# EAGLE board pcb arriba (EAGLE 9.6.2)
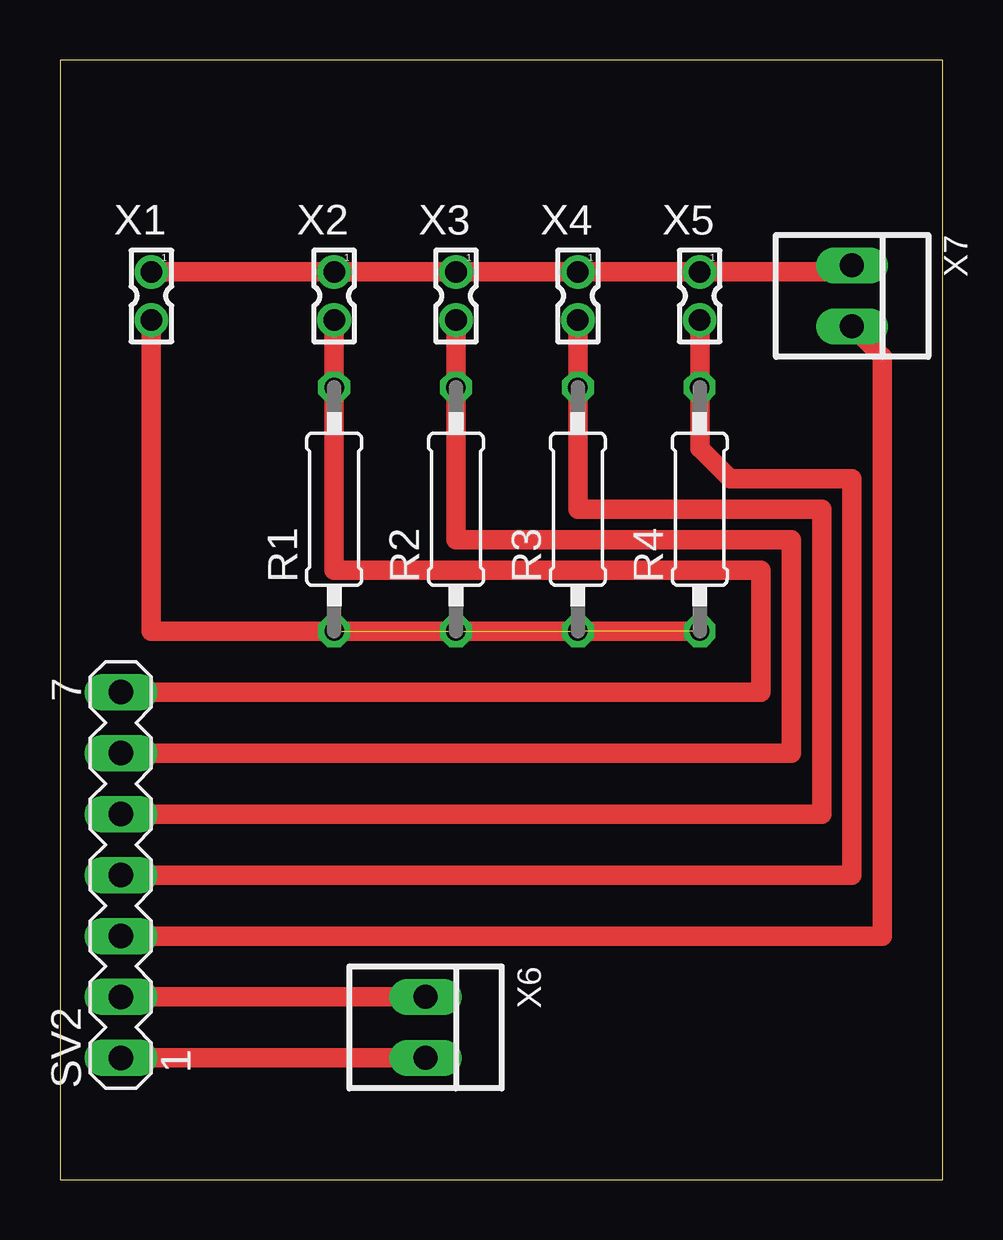
[diagram p0: board, top side]

Size 36.81 x 46.66 mm. Coordinates in mm from the lower left corner, seen from the top.
Outline: 0,0 36.81,0 36.81,46.66 0,46.66 0,0
Copper layers (1*16): Top 0.035mm / dielectric 1.5mm / Bottom 0.035mm
Design rules "default *": minimum track width 6mil, minimum drill 0.35mm, track to track 6mil, track to pad 6mil, pad to pad 6mil, via to via 30mil, smd to smd 6mil, copper to edge 40mil, drill to drill 6mil, minimum pad ring 10mil, minimum via ring 8mil, stop-mask expansion 4mil, vias tented up to drill 0mil, thermal gap 10mil

## Footprints (pad centres in the part's own frame; a part is rotated, then mirrored left to right if it is on the bottom)
0207/10 = drill 0.813 octagon: 1 -5.08,0; 2 5.08,0
MA07-1 = drill 1.016 long: 1 -7.62,0; 2 -5.08,0; 3 -2.54,0; 4 0,0; 5 2.54,0; 6 5.08,0; 7 7.62,0
87758-0216 = drill 0.9 pad 1.27: 1 0,-1; 2 0,1
22-23-2021 = drill 1 long: 1 -1.27,0; 2 1.27,0

## Placement (x,y rotation side)
R1  [0207/10]  11.43,27.94 90 top
R2  [0207/10]  16.51,27.94 90 top
R3  [0207/10]  21.59,27.94 90 top
R4  [0207/10]  26.67,27.94 90 top
SV2  [MA07-1]  2.54,12.7 90 top
X1  87758-0216  [87758-0216]  3.81,36.83 180 top
X2  87758-0216  [87758-0216]  11.43,36.83 180 top
X3  87758-0216  [87758-0216]  16.51,36.83 180 top
X4  87758-0216  [87758-0216]  21.59,36.83 180 top
X5  87758-0216  [87758-0216]  26.67,36.83 180 top
X6  22-23-2021  [22-23-2021]  15.24,6.35 270 top
X7  22-23-2021  [22-23-2021]  33.02,36.83 270 top

## Library data of the parts
R1-R4 = rcl; SPICEPREFIX: R
SV2 = con-lstb; OC_FARNELL: unknown; OC_NEWARK: unknown
X1-X5 = con-molex; MF: MOLEX; MPN: 87758-0216; OC_FARNELL: unknown; OC_NEWARK: 94M1513
X6 X7 = con-molex; MF: MOLEX; MPN: 22-23-2021; OC_FARNELL: 1462926; OC_NEWARK: 25C3832

## Nets
N$1: X1.1 X2.1 X3.1 X4.1 X5.1 X7.1
N$2: SV2.3 X7.2
N$3: SV2.1 X6.2
N$4: R1.1 R2.1 R3.1 R4.1 X1.2
N$5: SV2.2 X6.1
N$6: R4.2 SV2.4 X5.2
N$13: R3.2 SV2.5 X4.2
N$14: R2.2 SV2.6 X3.2
N$15: R1.2 SV2.7 X2.2

## Tracks (layer width: path | path; a pad name or v marks a point on that pad's centre or on a via)
N$1
  Top 0.813: X7.1 32.75,37.83 X5.1 X4.1 X3.1 X2.1 X1.1
N$2
  Top 0.813: X7.2 34.29,34.29 34.29,10.16 SV2.3
N$3
  Top 0.813: SV2.1 X6.2
N$4  (3 unrouted)
  Top 0.813: X1.2 3.81,22.86 R4.1
N$5
  Top 0.813: SV2.2 X6.1
N$6
  Top 0.813: X5.2 R4.2 26.67,30.48 27.94,29.21 33.02,29.21 33.02,12.7 SV2.4
N$13
  Top 0.813: X4.2 R3.2 21.59,27.94 31.75,27.94 31.75,15.24 SV2.5
N$14
  Top 0.813: X3.2 R2.2 16.51,26.67 30.48,26.67 30.48,17.78 SV2.6
N$15
  Top 0.813: X2.2 R1.2 11.43,25.4 29.21,25.4 29.21,20.32 SV2.7